# EAGLE board Adafruit LC709203F LiPoly LiIon Fuel Gauge and Battery Monitor (EAGLE 9.6.2)
REV: A
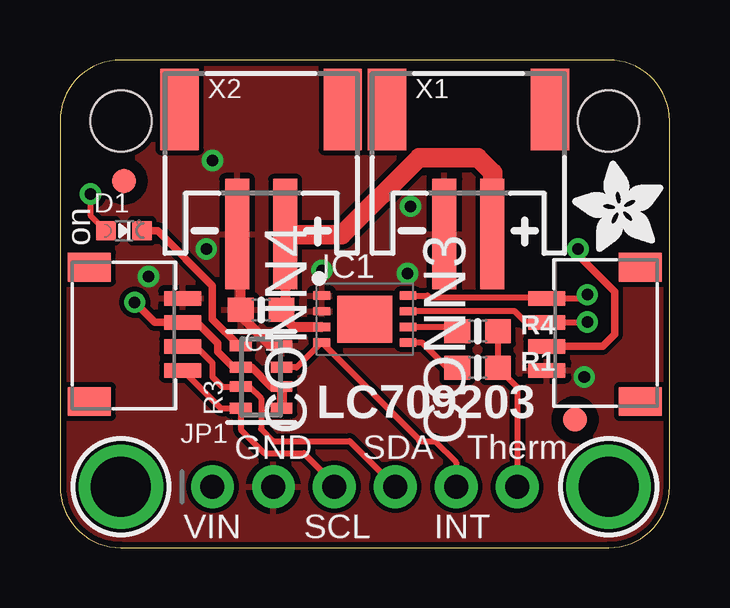
[diagram p0: board, top side]
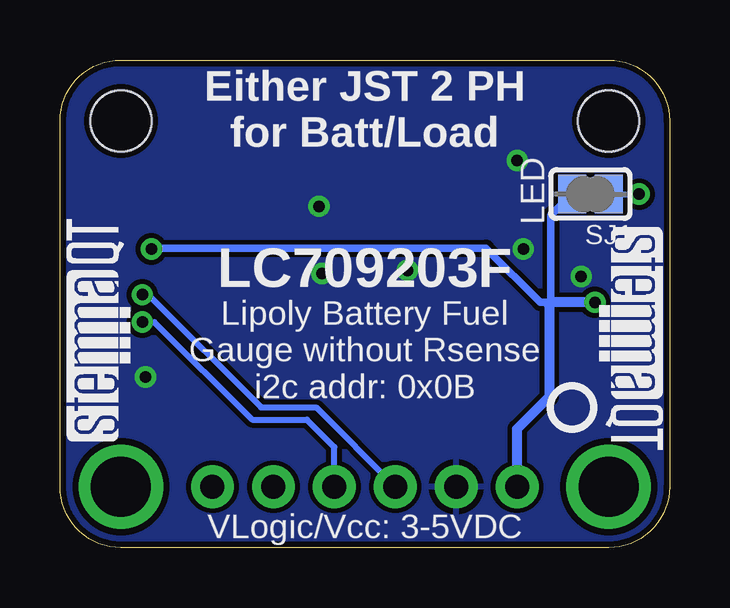
[diagram p1: board, bottom side, seen from below]

Size 25.4 x 20.32 mm. Coordinates in mm from the lower left corner, seen from the top.
Outline: 0,17.78 0,2.54 arc90 2.54,0 22.86,0 arc90 25.4,2.54 25.4,17.78 arc90 22.86,20.32 2.54,20.32 arc90 0,17.78
Copper layers (1*16): Top 0.035mm / dielectric 1.5mm / Bottom 0.035mm
Design rules "adafruit *": minimum track width 8mil, minimum drill 15.5mil, track to track 8mil, track to pad 8mil, pad to pad 8mil, via to via 8mil, smd to smd 8mil, copper to edge 10mil, drill to drill 8mil, minimum pad ring 10mil, minimum via ring 8mil, stop-mask expansion 2mil, vias tented up to drill 20mil, thermal gap 10mil
Net classes: 1 highpower: width 0.406 mm, drill 0.483 mm; 2 lowpower: width 0.305 mm, drill 0.483 mm
Holes 2.54 mm at 2.54,17.78 22.86,17.78

## Footprints (pad centres in the part's own frame; a part is rotated, then mirrored left to right if it is on the bottom)
0603-NO = smd 1.075 x 1: 1 -0.85,0; 2 0.85,0
JST_SH4 = smd 0.6 x 1.55: 1 -1.5,2.514; 2 -0.5,2.514; 3 0.5,2.514; 4 1.5,2.514 | smd 1.2 x 1.8: MT1 -2.8,-1.386; MT2 2.8,-1.386
CHIPLED_0603_NOOUTLINE = smd 0.8 x 0.8: A 0,-0.75; C 0,0.75
FIDUCIAL_1MM = smd 1 x 1: 1 0,0
WDFN8_3X4_0.65 = smd 0.7 x 0.35: 1 -1.8,0.975; 2 -1.8,0.325; 3 -1.8,-0.325; 4 -1.8,-0.975; 5 1.8,-0.975; 6 1.8,-0.325; 7 1.8,0.325; 8 1.8,0.975 | smd 2.3 x 1.96: P$9 0,0
1X06_ROUND_70 = drill 1 pad 1.778: 1 -6.35,0; 2 -3.81,0; 3 -1.27,0; 4 1.27,0; 5 3.81,0; 6 6.35,0
RESPACK_4X0603 = smd 0.45 x 0.9: 1 -1.3,-0.85; 2 -0.4,-0.85; 3 0.4,-0.85; 4 1.3,-0.85; 5 1.3,0.85; 6 0.4,0.85; 7 -0.4,0.85; 8 -1.3,0.85
SOLDERJUMPER_CLOSEDWIRE = smd 1.168 x 1.6: 1 -0.762,0; 2 0.762,0 | smd 0.635 x 0.203: WIRE 0,0
MOUNTINGHOLE_2.5_PLATED = drill 2.5 pad 3.2: P$1 0,0
JSTPH2_BATT = smd 1 x 4.6: 1 -1,-3.7; 2 1,-3.7 | smd 1.6 x 3.4: NC1 -3.4,1.5; NC2 3.4,1.5

## Placement (x,y rotation side)
C1  1uF  [0603-NO]  8.38,9.91 180 top
CONN3  STEMMA_I2C_QT  [JST_SH4]  22.8,8.89 90 top
CONN4  STEMMA_I2C_QT  [JST_SH4]  2.6,8.89 270 top
D1  GREEN  [CHIPLED_0603_NOOUTLINE]  2.67,13.21 270 top
FID3  FIDUCIAL_1MM  [FIDUCIAL_1MM]  21.46,5.33 0 top
FID4  FIDUCIAL_1MM  [FIDUCIAL_1MM]  2.67,15.28 0 top
IC1  LC709203F  [WDFN8_3X4_0.65]  12.7,9.53 0 top
JP1  [1X06_ROUND_70]  12.7,2.54 0 top
R1  10K  [0603-NO]  17.4,7.49 0 top
R3  10K  [RESPACK_4X0603]  8.38,7.11 90 top
R4  100  [0603-NO]  17.4,9.02 0 top
SJ1  [SOLDERJUMPER_CLOSEDWIRE]  3.3,14.73 180 bottom
U$19  MOUNTINGHOLE2.5  [MOUNTINGHOLE_2.5_PLATED]  2.54,2.54 0 top
U$21  MOUNTINGHOLE2.5  [MOUNTINGHOLE_2.5_PLATED]  22.86,2.54 0 top
U$22  [ADAFRUIT_3.5MM]  25.15,12.32 90 top
U$25  [PCBFEAT-REV-040]  4.06,5.84 0 bottom
U$30  [STEMMAQT]  22.48,4.45 90 bottom
U$31  [STEMMAQT]  2.92,13.34 270 bottom
X1  JST 2 PH  [JSTPH2_BATT]  17.02,16.76 0 top
X2  JST 2 PH  [JSTPH2_BATT]  8.38,16.76 0 top

## Library data of the parts
C1 CONN3 CONN4 D1 IC1 JP1 R1 R3 R4 SJ1 U$22 U$25 X1 X2 = microbuilder
FID3 FID4 U$19 U$21 = microbuilder; BOM: EXCLUDE
U$30 U$31 = silks

## Nets
GND [highpower]: C1.2 CONN3.1 CONN4.1 IC1.1 IC1.2 JP1.2 R3.4 X1.1 X2.1
INT: IC1.4 JP1.5 R3.3
N$1: D1.C R3.5
N$2: D1.A SJ1.1
SCL: CONN3.4 CONN4.4 IC1.8 JP1.3 R3.8
SDA: CONN3.3 CONN4.3 IC1.7 JP1.4 R3.7
THERM: JP1.6 R1.2 R4.2
TSENSE: IC1.6 R4.1
TSW: IC1.5 R1.1
VBAT [highpower]: C1.1 IC1.3 X1.2 X2.2
VCC [lowpower]: CONN3.2 CONN4.2 JP1.1 R3.1 R3.2 R3.6 SJ1.2

## Tracks (layer width: path | path; a pad name or v marks a point on that pad's centre or on a via)
GND  (via drill 0.48)
  Top 0.406: X2.1 7.53,12.91 C1.2 7.53,9.66 8.78,8.41 R3.4
  other vias: 6.1,12.45 3.68,11.3 10.92,11.56 14.61,14.22 6.35,16.13 14.48,11.43 21.84,7.11
  pour Top: 0,20.32 25.4,20.32 25.4,0 0,0
  pour Bottom: 0,20.32 25.4,20.32 25.4,0 0,0
INT
  Top 0.254: JP1.5 16.51,3.56 15.62,4.45 14.96,4.45 14.96,4.49 IC1.4 9.86,7.51 R3.3
N$1
  Top 0.305: D1.C 4.06,13.21 6.35,10.92 6.35,9.53 7.46,8.41 R3.5
N$2  (via drill 0.48)
  Top 0.254: D1.A 1.27,13.86 v1.27,14.73
  Bottom 0.254: SJ1.1 v1.27,14.73
SCL  (via drill 0.48)
  Top 0.254: CONN4.4 6.7,5.81 R3.8 7.53,4.91 8.51,3.94 10.16,3.94 11.43,2.67 JP1.3 | v21.97,10.54 21.82,10.39 CONN3.4 20.24,10.43 15.38,10.43 15.31,10.5 IC1.8
  Bottom 0.254: JP1.3 14.73,5.84 17.02,5.84 21.72,10.54 v21.97,10.54
SDA  (via drill 0.48)
  Top 0.254: CONN4.3 5.66,8.39 6.35,7.7 6.35,7.11 6.75,6.71 R3.7 7.89,6.71 8.38,6.22 8.38,4.95 8.89,4.45 12.06,4.45 JP1.4 | v21.97,9.4 v21.96,9.39 CONN3.3 19.4,9.4 18.95,9.86 IC1.7
  Bottom 0.254: v21.97,9.4 21.46,9.4 17.4,5.33 15.11,5.33 13.97,4.19 JP1.4
THERM
  Top 0.254: R4.2 R1.2 19.05,6.69 JP1.6
TSENSE
  Top 0.254: R4.1 16.36,9.21 16.36,9.2 IC1.6
TSW
  Top 0.254: R1.1 16.13,7.49 15.07,8.55 15.06,8.55 IC1.5
VBAT
  Top 0.406: X2.2 9.38,10.06 | 9.38,10.06 C1.1 | 9.38,10.06 9.38,9.54 9.72,9.2 IC1.3
  Top 0.813: X2.2 9.41,13.03 11.75,13.03 14.97,16.26 17.4,16.26 18.03,15.62 18.03,13.08 X1.2
VCC  (via drill 0.48)
  Top 0.305: v3.11,10.22 3.94,9.39 CONN4.2 5.7,9.39 6.57,8.52 6.57,8.17 7.22,7.51 R3.6 7.98,7.51 8.78,6.71 R3.2 | CONN3.2 22.61,8.39 23.11,8.89 23.11,10.67 21.59,12.19 v21.59,12.45
  Top 0.406: R3.2 R3.1
  Bottom 0.305: v21.59,12.45 21.55,12.48 7.66,12.48 5.4,10.22 4.83,10.22 | 4.83,10.22 v3.11,10.22 | SJ1.2 4.95,13.84 4.95,10.35 4.83,10.22
  Bottom 0.406: JP1.1 6.35,4.95 5.02,6.29 5.02,10.1 4.89,10.22 v3.11,10.22

## Text on the board
tPlace: on | LC709203 | GND | SDA | Therm | VIN | SCL | INT
bPlace: Either JST 2 PH / for Batt/Load | LED | LC709203F | Lipoly Battery Fuel / Gauge without Rsense / i2c addr: 0x0B | VLogic/Vcc: 3-5VDC